# EAGLE board switch-beep (EAGLE 5.04)
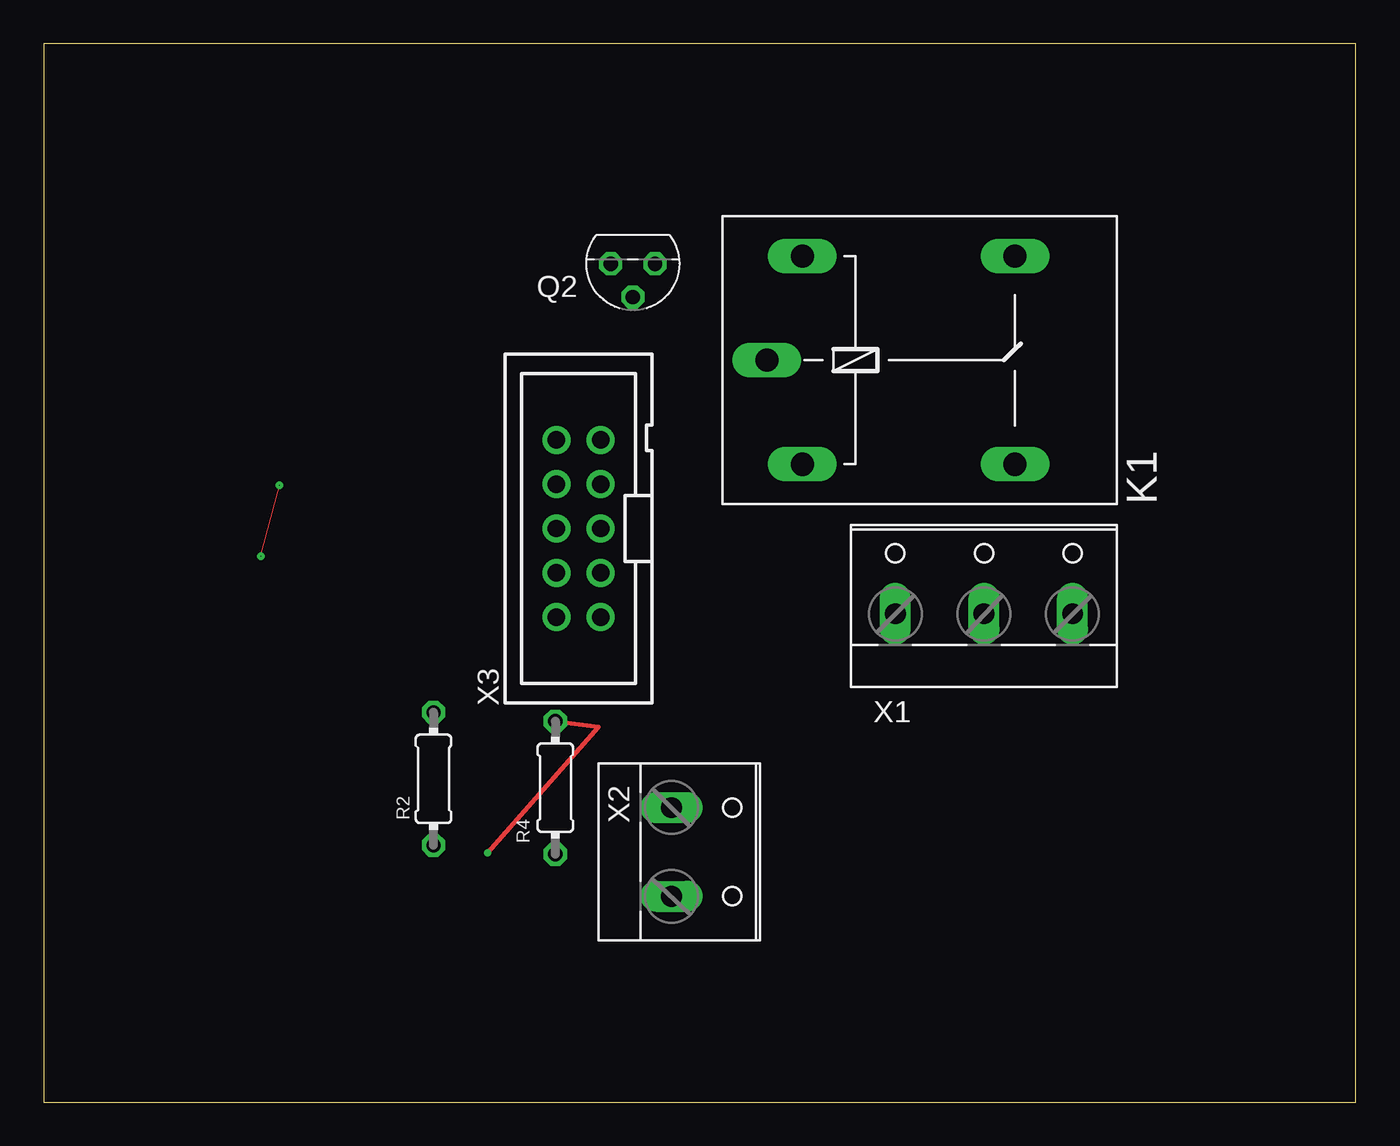
[diagram p0: board, top side]
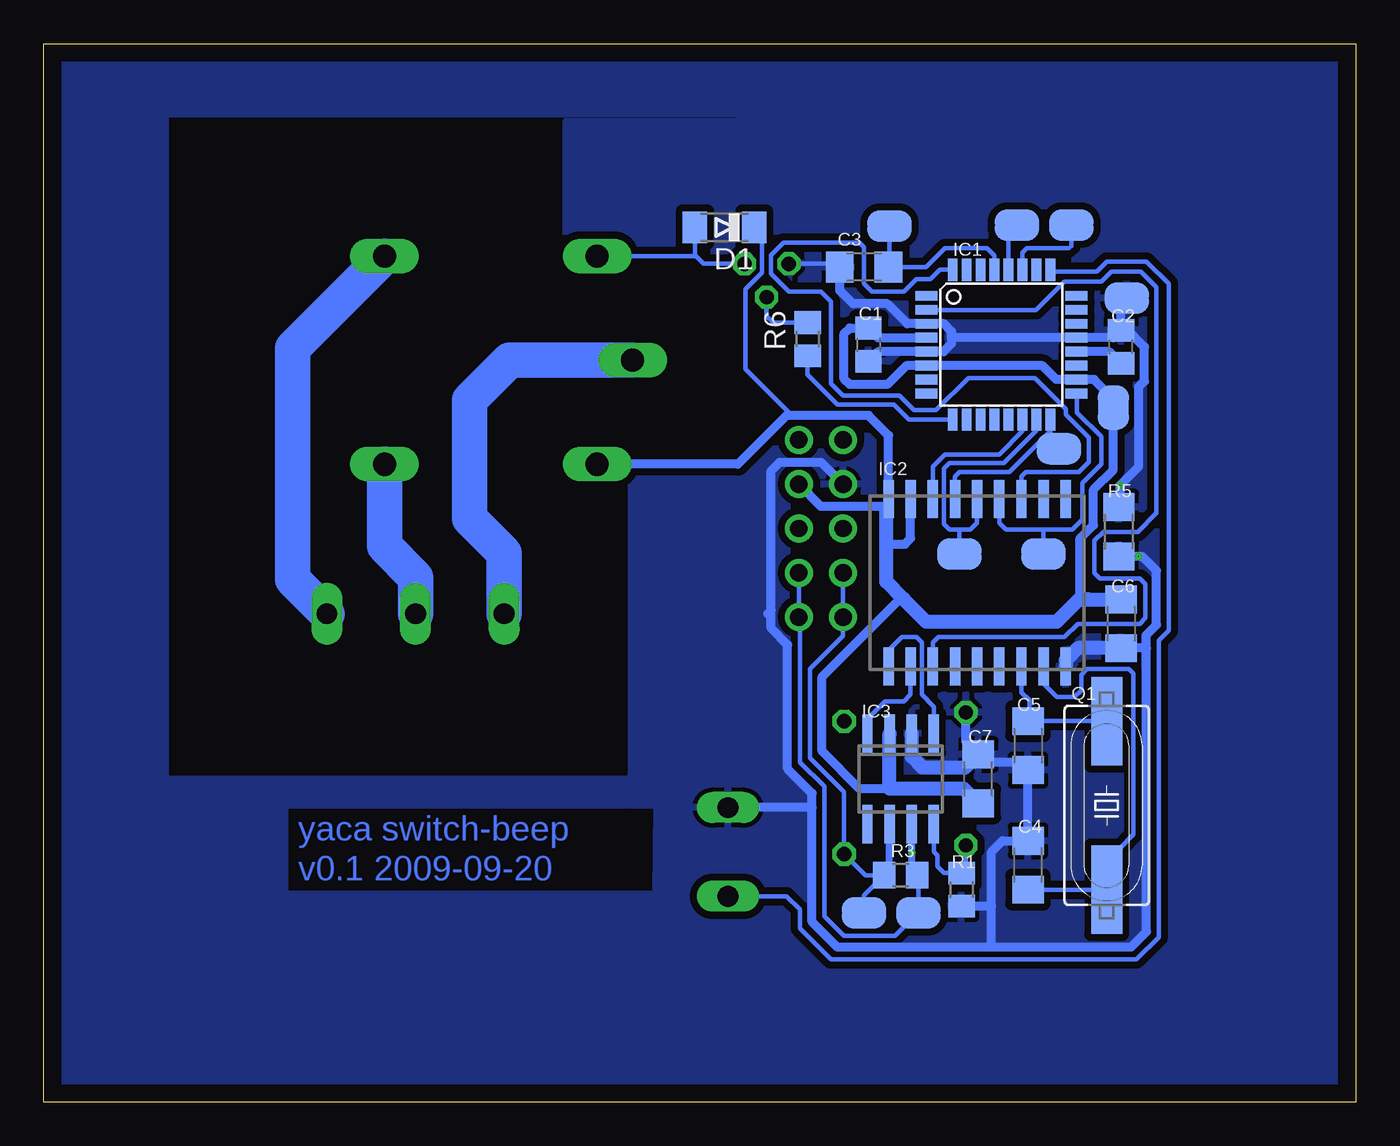
[diagram p1: board, bottom side, seen from below]

Size 75.23 x 60.7 mm. Coordinates in mm from the lower left corner, seen from the top.
Outline: 0,0 75.23,0 75.23,60.7 0,60.7 0,0
Copper layers (1*16): Top 0.035mm / dielectric 1.5mm / Bottom 0.035mm
Design rules "default": minimum track width 10mil, minimum drill 24mil, track to track 8mil, track to pad 8mil, pad to pad 8mil, via to via 8mil, smd to smd 8mil, copper to edge 40mil, drill to drill 8mil, minimum pad ring 10mil, minimum via ring 8mil, stop-mask expansion 4mil, vias tented up to drill 0mil, thermal gap 10mil

## Footprints (pad centres in the part's own frame; a part is rotated, then mirrored left to right if it is on the bottom)
C0805 = smd 1.3 x 1.5: 1 -0.95,0; 2 0.95,0
C1206 = smd 1.6 x 1.8: 1 -1.4,0; 2 1.4,0
MINIMELF = smd 1.4 x 1.8: A 1.7,0; C -1.7,0
TQFP32-08 = smd 1.27 x 0.559: 1 -4.293,2.8; 2 -4.293,2; 3 -4.293,1.2; 4 -4.293,0.4; 5 -4.293,-0.4; 6 -4.293,-1.2; 7 -4.293,-2; 8 -4.293,-2.8; 17 4.293,-2.8; 18 4.293,-2; 19 4.293,-1.2; 20 4.293,-0.4; 21 4.293,0.4; 22 4.293,1.2; 23 4.293,2; 24 4.293,2.8 | smd 0.559 x 1.27: 9 -2.8,-4.293; 10 -2,-4.293; 11 -1.2,-4.293; 12 -0.4,-4.293; 13 0.4,-4.293; 14 1.2,-4.293; 15 2,-4.293; 16 2.8,-4.293; 25 2.8,4.293; 26 2,4.293; 27 1.2,4.293; 28 0.4,4.293; 29 -0.4,4.293; 30 -1.2,4.293; 31 -2,4.293; 32 -2.8,4.293
SO18 = smd 0.6 x 2.2: 1 -5.08,-4.8; 2 -3.81,-4.8; 3 -2.54,-4.8; 4 -1.27,-4.8; 5 0,-4.8; 6 1.27,-4.8; 7 2.54,-4.8; 8 3.81,-4.8; 9 5.08,-4.8; 10 5.08,4.8; 11 3.81,4.8; 12 2.54,4.8; 13 1.27,4.8; 14 0,4.8; 15 -1.27,4.8; 16 -2.54,4.8; 17 -3.81,4.8; 18 -5.08,4.8
SO08 = smd 0.6 x 2.2: 1 -1.905,-2.6; 2 -0.635,-2.6; 3 0.635,-2.6; 4 1.905,-2.6; 5 1.905,2.6; 6 0.635,2.6; 7 -0.635,2.6; 8 -1.905,2.6
G5LE = drill 1.321 long: 1 -7.493,-5.969; 2 -7.493,5.969; O 4.699,5.969; P -9.525,0; S 4.699,-5.969
PAD = smd 2.54 x 1.778: 1 0,0
SM49 = smd 5.08 x 1.778: 1 -4.826,0; 2 4.826,0
TO92 = drill 0.813 octagon: 1 1.27,0; 2 0,1.905; 3 -1.27,0
R0805 = smd 1.3 x 1.5: 1 -0.95,0; 2 0.95,0
0204/7 = drill 0.813 octagon: 1 -3.81,0; 2 3.81,0
R1206 = smd 1.6 x 1.803: 1 -1.422,0; 2 1.422,0
W237-3E = drill 1.194 long: 1 -5.08,-0.635; 2 0,-0.635; 3 5.08,-0.635
W237-132 = drill 1.194 long: 1 -2.54,-0.635; 2 2.54,-0.635
PINHDX-2X5 = drill 1 pad 1.6 round: 1 -5.08,-1.27; 2 -5.08,1.27; 3 -2.54,-1.27; 4 -2.54,1.27; 5 0,-1.27; 6 0,1.27; 7 2.54,-1.27; 8 2.54,1.27; 9 5.08,-1.27; 10 5.08,1.27

## Placement (x,y rotation side)
C1  100 n  [C0805]  27.94,43.43 270 bottom
C2  100 n  [C0805]  13.46,43.31 90 bottom
C3  100 n  [C1206]  28.19,47.88 180 bottom
C4  22p  [C1206]  18.8,13.59 90 bottom
C5  22p  [C1206]  18.8,20.45 270 bottom
C6  100 n  [C1206]  13.46,27.43 270 bottom
C7  1 µ  [C1206]  21.65,18.54 90 bottom
D1  1N4148  [MINIMELF]  36.2,50.16 180 bottom
IC1  MEGA8-AI  [TQFP32-08]  20.32,43.43 0 bottom
IC2  MCP2515SO  [SO18]  21.72,29.78 0 bottom
IC3  PCA82C251SO  [SO08]  26.1,18.54 180 bottom
K1  6V  [G5LE]  50.99,42.55 0 top
P1  VCC  [PAD]  13.91,39.81 90 bottom
P2  GND  [PAD]  13.14,46.1 0 bottom
P3  MISO  [PAD]  17.02,37.47 0 bottom
P4  MOSI  [PAD]  22.73,31.43 180 bottom
P5  SCK  [PAD]  17.91,31.43 0 bottom
P6  !RESET  [PAD]  26.73,50.23 0 bottom
P7  CANH  [PAD]  25.08,10.86 180 bottom
P8  CANL  [PAD]  28.19,10.86 0 bottom
P11  XSPK1  [PAD]  16.32,50.29 0 bottom
P12  XSPK2  [PAD]  19.43,50.29 0 bottom
Q1  16 MHz  [SM49]  14.29,17.02 90 bottom
Q2  BC337-16  [TO92]  33.78,48.07 180 top
R1  47 k  [R0805]  22.61,12.19 90 bottom
R2  47 k  [0204/7]  22.35,18.54 270 top
R3  120  [R0805]  26.1,13.02 0 bottom
R4  120  [0204/7]  29.34,18.03 90 top
R5  0  [R1206]  13.59,32.7 270 bottom
R6  1 k  [R0805]  31.43,43.75 90 bottom
X1  [W237-3E]  53.91,28.64 0 top
X2  [W237-132]  36.64,14.35 270 top
X3  PINHDX-2X5  [PINHDX-2X5]  30.67,32.89 90 top

## Library data of the parts
C1-C7 R1-R6 = rcl
D1 = diode
IC1 = atmel
IC2 IC3 P1-P8 P11 P12 X3 = yaca
K1 = relay
Q1 = crystal
Q2 = transistor-npn
X1 X2 = con-wago-508

## Nets
!RESET: C3.1 IC1.29 P6.1
CANH: IC3.7 P7.1 R3.2 R4.2 X3.1 X3.3
CANL: IC3.6 P8.1 R3.1 R4.1 X3.2 X3.4
CLKOUT: IC1.2 IC2.3
CS: IC1.14 IC2.16
GND: C1.2 C2.2 C3.2 C4.2 C5.2 C6.2 C7.2 IC1.3 IC1.5 IC1.21 IC2.9 IC3.2 P2.1 Q2.1 R1.1 R2.1 R5.1 R5.2 X2.1 X3.8
INT: IC1.32 IC2.12
MISO: IC1.16 IC2.15 P3.1
MOSI: IC1.15 IC2.14 P4.1
N$1: D1.A K1.2 Q2.3
N$2: C2.1 IC1.20
N$3: Q2.2 R6.2
N$4: K1.O X1.3
N$5: K1.P X1.1
N$6: K1.S X1.2
RS: IC3.8 R1.2 R2.2
RXCAN: IC2.2 IC3.4
SCK: IC1.17 IC2.13 P5.1
SWITCH: IC1.25 X2.2
TRANS: IC1.9 R6.1
TXCAN: IC2.1 IC3.1
VCC: C1.1 C6.1 C7.1 D1.C IC1.4 IC1.6 IC1.18 IC2.17 IC2.18 IC3.3 K1.1 P1.1 X3.7
X1: C4.1 IC2.8 Q1.1
X2: C5.1 IC2.7 Q1.2
XSPK1: IC1.27 P11.1
XSPK2: IC1.28 P12.1

## Tracks (layer width: path | path; a pad name or v marks a point on that pad's centre or on a via)
!RESET
  Bottom 0.254: IC1.29 20.72,48.53 21.14,48.96 23.56,48.96 24.64,47.88 C3.1 26.73,47.94 P6.1
CANH  (via drill 0)
  Top 0.254: v25.46,14.29 31.81,21.53 R4.2
  Bottom 0.254: 25.46,13.33 R3.2 25.08,12.95 P7.1 26.42,9.53 29.34,9.53 30.48,10.67 30.48,18.1 31.88,19.49 31.88,28 X3.1 X3.3 | IC3.7 25.46,16.7
  Bottom 0.406: 25.46,13.33 v25.46,14.29 IC3.7
CANL
  Bottom 0.254: R3.1 26.73,13.33 | R3.1 27.37,12.89 27.3,13.02 | P8.1 28.19,11.87 R3.1 | 27.3,13.02 27.24,13.02 | 27.3,13.02 28.13,13.02 R4.1 29.34,17.78 31.3,19.75 31.3,24.83 29.4,26.73 X3.2 X3.4
  Bottom 0.406: 26.73,13.33 IC3.6
CLKOUT
  Bottom 0.254: IC2.3 24.26,26.35 23.94,26.67 16.7,26.67 15.94,27.43 12.38,27.43 12.06,27.75 12.06,29.72 12.38,30.04 14.67,30.04 14.99,30.35 14.99,32.19 14.48,32.7 12.51,32.7 11.43,33.78 11.43,46.74 12.32,47.62 14.03,47.62 14.61,47.05 16.7,47.05 18.35,45.4 24.58,45.4 IC1.2
CS
  Bottom 0.254: IC1.14 19.12,38.47 20.45,37.15 23.56,37.15 24.26,36.45 IC2.16
GND  (via drill 0.03)
  Top 0.051: v12.45,31.3 v13.53,35.37
  Bottom 0.254: 21.34,19.49 C7.2 | 12.33,31.28 12.33,31.36 v12.45,31.3 | Q2.1 29.79,48.07 C3.2
  Bottom 0.508: C1.2 27.39,43.03 IC1.5 23.64,43.03 23.18,43.5 23.18,43.75 | 23.18,43.75 23.18,44.2 23.62,44.63 IC1.3 25.72,44.64 26.86,45.78 28.83,45.78 29.59,46.54 C3.2 | 23.18,43.75 23.09,43.83 IC1.21 13.88,43.83 C2.2 | C6.2 13.02,26.36 C6.2 12,26.04 | C2.2 13.08,44.26 12.13,43.31 12.13,41.34 12.45,41.02 12.45,36.45 v13.53,35.37 13.53,34.44 R5.1 | 20.89,8.89 12.89,8.89 12,9.78 12,26.04 | 20.89,8.89 20.89,11.24 | 20.89,11.24 20.89,14.35 20.26,14.99 C4.2 C5.2 18.8,19.56 18.8,19.49 21.34,19.49 | R2.1 22.35,20.64 C7.2 | R1.1 20.89,11.24 | C2.2 13.46,46.1 P2.1 | 12,26.04 12,26.8 11.43,27.37 11.43,30.48 12.23,31.28 12.33,31.28 R5.2 | X3.8 30.67,36.7 33.02,36.7 33.53,36.2 33.53,28.19 | 33.53,28.19 33.53,27.18 32.58,26.23 32.58,19.11 31.18,17.72 31.18,16.89 | 31.18,16.89 31.18,10.35 29.72,8.89 20.89,8.89 | 33.53,28.19 33.72,28 | 31.18,16.89 X2.1
  Bottom 0.813: C6.2 15.94,26.04 16.64,25.34 IC2.9 | IC3.2 25.46,19.81 24.83,19.18 22.42,19.18 C7.2
  pour Bottom (isolate 0.406): 35.37,60.33 0.44,60.33 0.44,0.44 74.8,0.44 74.8,60.33 35.75,60.33 35.75,56.64 68.26,56.64 68.26,18.54 41.72,18.54 41.72,17.02 61.4,17.02 61.4,11.94 40.13,11.94 40.07,17.02 41.53,17.02 41.53,37.34 34.86,37.34 34.86,47.75 45.28,47.75 45.28,56.26 35.37,56.26
INT
  Bottom 0.254: IC1.32 23.84,47.73 24.38,47.18 25.21,47.18 25.91,46.48 27.75,46.48 28.19,46.93 28.19,49.02 28.45,49.28 32.83,49.28 33.53,48.58 33.53,47.5 32.51,46.48 30.67,46.48 30.1,45.91 30.1,41.21 29.4,40.51 26.16,40.51 25.34,39.69 24.07,39.69 22.23,41.53 18.41,41.53 16.64,39.75 16.64,39.43 15.3,38.1 15.3,36.7 15.88,36.13 18.92,36.13 19.18,35.88 IC2.12
MISO
  Bottom 0.254: 17.52,38.49 IC1.16 | 17.52,38.49 19.88,36.13 22.73,36.13 22.99,35.88 IC2.15 | P3.1 17.51,37.91 17.52,38.49
MOSI
  Bottom 0.254: IC1.15 18.32,38.51 20.19,36.64 23.3,36.64 23.62,36.32 23.62,33.15 23.3,32.83 22.73,32.83 | IC2.14 21.72,33.21 22.1,32.83 22.73,32.83 | P4.1 22.73,32.83
N$1
  Bottom 0.254: Q2.3 37.4,48.07 37.85,48.51 | 37.85,48.51 K1.2 | D1.A 37.9,48.56 37.85,48.51
N$2
  Bottom 0.508: IC1.20 14.14,43.03 C2.1
N$3
  Bottom 0.254: Q2.2 33.78,45.09 33.4,44.7 32.58,44.7 32.32,44.7 R6.2
N$4
  Bottom 2.032: X1.3 60.96,29.97 60.96,43.24 K1.O
N$5
  Bottom 2.032: K1.P 48.51,42.55 50.8,40.26 50.8,33.47 48.83,31.5 X1.1
N$6
  Bottom 2.032: K1.S 55.69,31.88 53.91,30.1 X1.2
RS
  Bottom 0.254: IC3.8 24.19,14.73 24.19,14.35 24,14.16 24,13.53 23.62,13.14 R1.2 22.35,13.4 R2.2
RXCAN
  Bottom 0.254: IC2.2 25.53,23.37 25.91,22.99 26.99,22.99 28,21.97 IC3.4
SCK
  Bottom 0.254: IC1.17 16,40.57 16,39.55 14.61,38.16 14.61,36.58 15.68,35.5 15.68,33.4 16.26,32.83 17.91,32.83 | 17.91,32.83 P5.1 | 17.91,32.83 20.07,32.83 20.45,33.21 IC2.13
SWITCH
  Bottom 0.254: IC1.25 17.42,47.62 14.86,47.62 14.29,48.2 12,48.2 10.73,46.93 10.73,27.05 11.3,26.48 11.3,9.46 12.57,8.19 30.1,8.19 31.88,9.97 31.88,11.05 32.64,11.81 X2.2
TRANS
  Bottom 0.254: IC1.9 25.62,39.14 26.48,40.01 29.72,40.01 31.43,41.72 R6.1
TXCAN
  Bottom 0.254: IC2.1 26.8,25.91 26.04,26.67 25.21,26.67 24.89,26.35 24.89,23.37 24.19,22.67 IC3.1
VCC
  Bottom 0.254: 26.92,34.04 IC2.18 | P1.1 13.68,40.04 13.68,40.1 | D1.C 34.05,49.86 34.04,49.85 34.04,47.56 34.99,46.61 34.99,42.04 32.32,39.37
  Bottom 0.508: 24.59,43.81 IC1.4 27.39,43.83 C1.1 28.32,44.38 29.02,44.39 29.34,44.07 29.34,41.47 29.02,41.15 26.86,41.15 25.77,42.23 IC1.6 17.97,42.23 17.18,41.43 IC1.18 15.02,41.43 13.68,40.1 13.91,39.56 13.91,36.26 15.05,35.12 15.05,33.08 15.81,32.32 15.81,29.21 15.43,28.83 C6.1 | 26.73,17.97 28.45,17.97 30.61,20.13 30.61,24.38 26.13,28.86 25.94,28.86 | X3.7 30.67,34.16 26.92,34.16 26.77,34.35 IC2.18 26.8,38.23 27.94,39.37 32.32,39.37 32.64,39.37 35.43,36.58 K1.1 | IC2.17 25.53,32.32 25.84,32 26.86,32 26.92,31.94
  Bottom 0.813: C6.1 13.53,28.83 15.37,28.83 15.36,28.83 15.88,28.83 17.14,27.56 24.64,27.56 25.94,28.86 26.92,29.84 26.92,31.94 26.92,34.04 | IC3.3 26.73,17.97 22.48,17.97 C7.1
X1
  Bottom 0.254: IC2.8 17.91,24 17.14,23.24 16.13,23.24 15.75,23.62 15.75,24.51 15.43,24.83 13.02,24.83 12.76,24.57 12.76,15.37 14.29,13.78 Q1.1 C4.1
X2
  Bottom 0.254: IC2.7 19.18,23.5 18.73,23.05 18.73,21.72 19.18,22.48 18.8,22.1 C5.1 Q1.2
XSPK1
  Bottom 0.254: IC1.27 19.12,48.7 18.86,48.96 16.45,48.96 16.32,49.09 P11.1
XSPK2
  Bottom 0.254: IC1.28 19.92,49.55 P12.1

## Text on the board
Bottom: yaca switch-beep | v0.1 2009-09-20